# Altium PCB ERN_MainPCB.PcbDoc
Units mil, origin at the board's own origin, x right, y up, seen from the top; angles counter-clockwise.
Board outline 3690 x 4050 mil, 2 copper layers (Top Layer, Bottom Layer); 73 components, 49 nets, 217 pads, 8 vias.
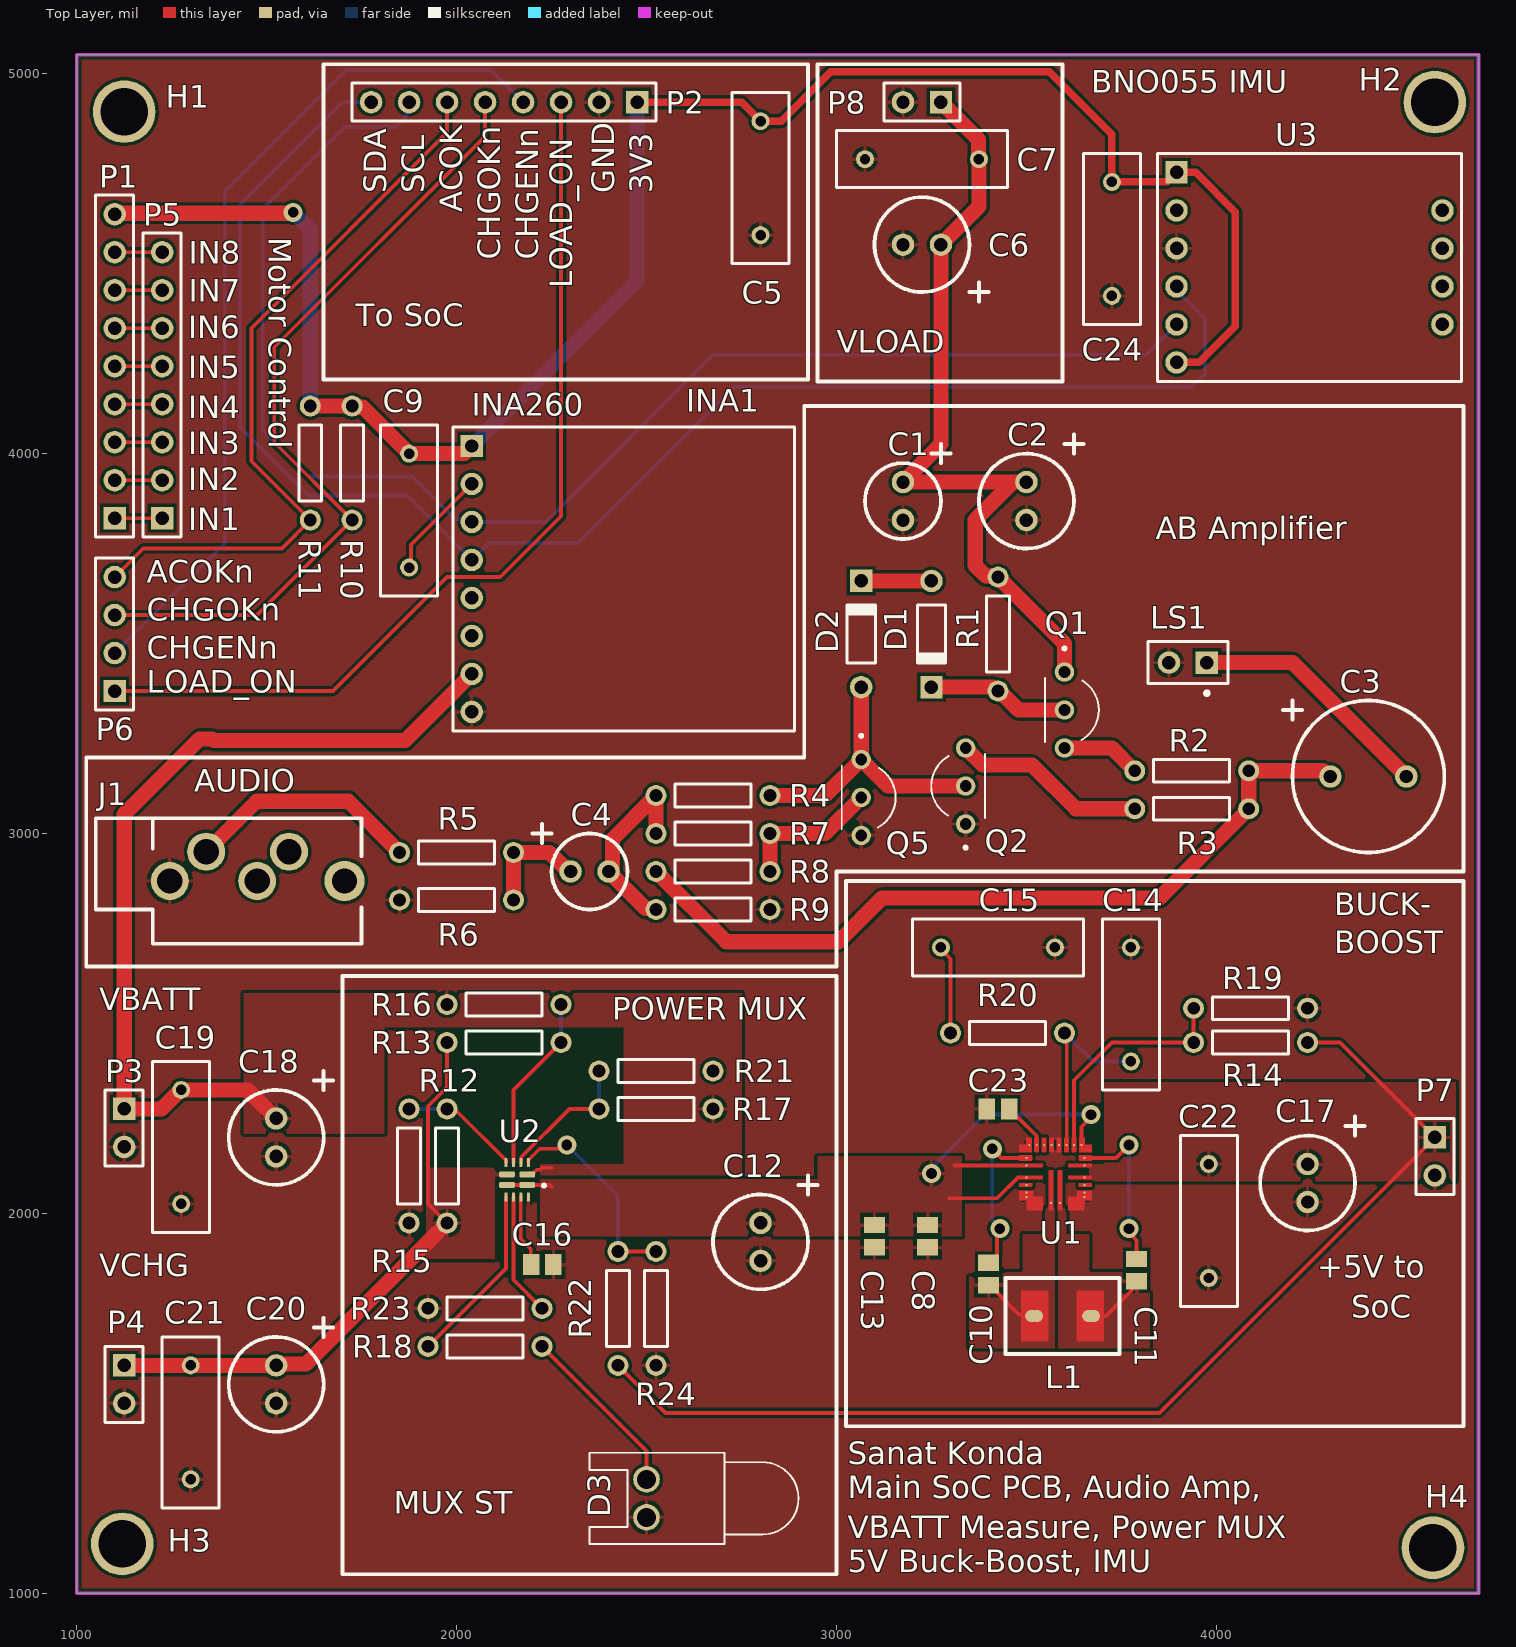
[diagram p0: Top Layer view]
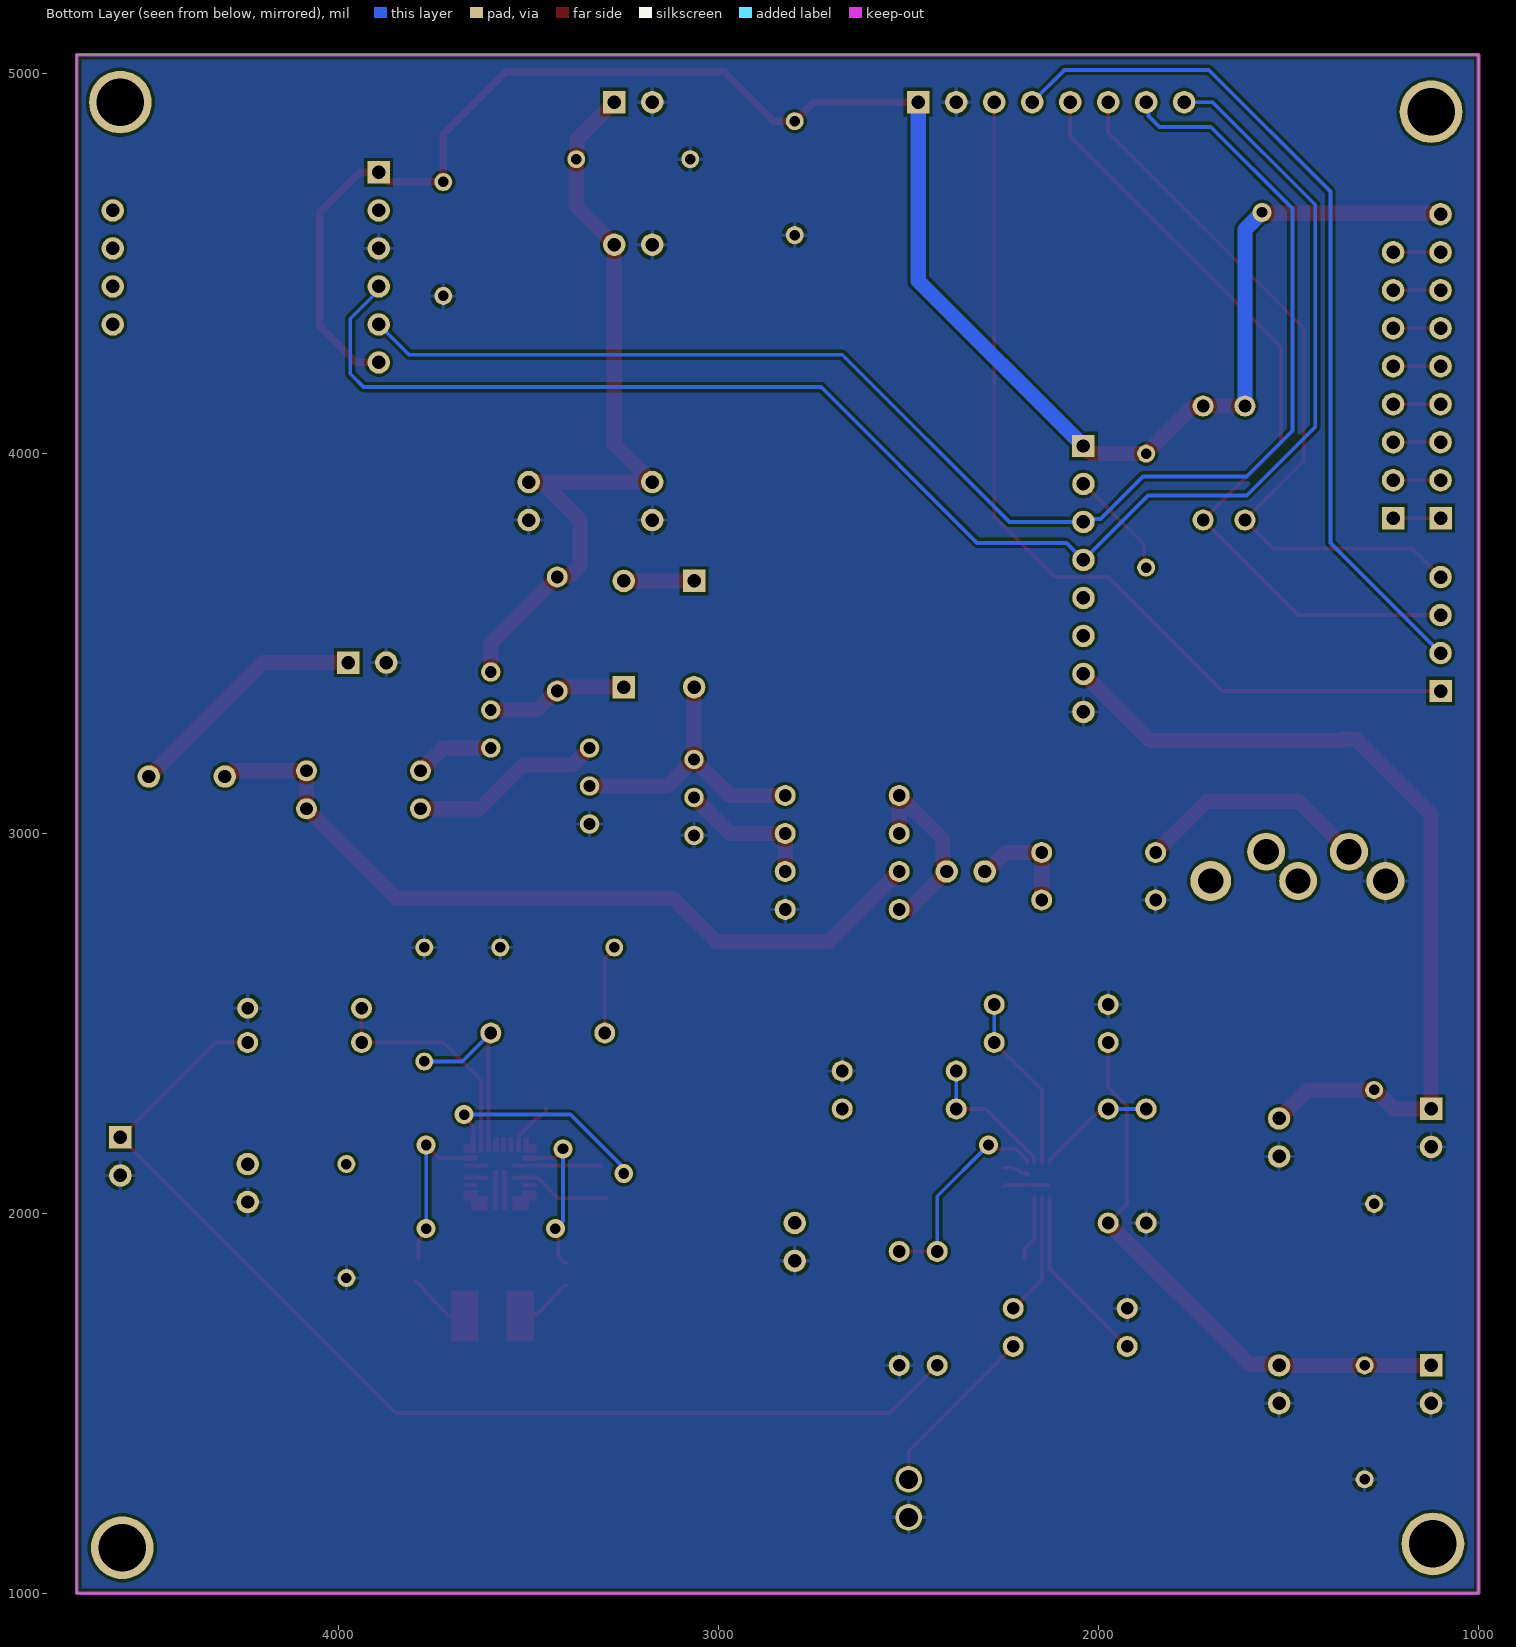
[diagram p1: Bottom Layer view, seen from below]

## Layer stack, top to bottom
Top Solder: solder mask 0.4, Solder Resist, Dk 3.5
Top Layer: signal copper 1.4
Dielectric 1: dielectric 12.6, FR-4, Dk 4.8
Bottom Layer: signal copper 1.4
Bottom Solder: solder mask 0.4, Solder Resist, Dk 3.5

## Board outline
1000,1000 1000,5050 4690,5050 4690,1000

## Design rules (kind name [scope] priority, off if disabled: settings)
Clearance [All] p1: gap=7.87 ignorepadtopadclearanceinfootprint=FALSE
MinimumAnnularRing [All] p1: minimumring=6
MinimumSolderMaskSliver [All] p1: minsoldermaskwidth=4
PolygonConnect [All] p1: connectstyle=Relief reliefconductorwidth=10 reliefentries=4 polygonreliefangle="90 Angle" airgapwidth=10
RoutingVias [All] p1: holewidth=28 width=50 viastyle="Through Hole" minholewidth=28 minwidth=50 maxholewidth=28 maxwidth=50
SolderMaskExpansion [All] p1: expansion=4 istentingtop=FALSE
SupplyNets "Schematic Supply Nets_4" [InNet('+3V3')] p1: voltage=0.000
SupplyNets "Schematic Supply Nets_3" [InNet('VLOAD')] p2: voltage=0.000
SupplyNets "Schematic Supply Nets_2" [InNet('+5')] p3: voltage=0.000
SupplyNets "Schematic Supply Nets_1" [InNet('VBATT')] p4: voltage=0.000
SupplyNets "Schematic Supply Nets" [InNet('GND')] p5: voltage=0.000
Width [All] p1: maxlimit=40 minlimit=10 preferedwidth=10
29 further rules are at their usual default settings.

## Classes and differential pairs
component class ERN_Main_2: C1 C2 C3 C4 D1 D2 J1 LS1 Q1 Q2 Q5 R1 R2 R3 R4 R5 R6 R7 R8 R9
component class ERN_Main: C5 C6 C7 C8 C9 C10 C11 C12 C13 C14 C15 C16 C17 C18 C19 C20 C21 C22 C23 C24 D3 H1 H2 H3 H4 INA1 L1 P1 P2 P3 P4 P5 P6 P7 P8 R10 R11 R12 R13 R14 R15 R16 R17 R18 R19 R20 R21 R22 R23 R24 U1 U2 U3

## Components (designator, comment, footprint, x,y, rotation, side; value= is the part's Value field where it differs from the comment)
C1 "Cap Pol1" Cap_10uF 3175,3875 r270 top value=10uF
C2 "Cap Pol1" Cap_47uF_100uF 3500,3875 r270 top value=100uF
C3 "Cap Pol1" Cap_1000uF 4400,3150 r0 top value=1000uF
C4 "Cap Pol1" Cap_10uF 2350,2900 r0 top value=15uF
C5 "Cap" RAD-0.3 2800,4725 r90 top value=0.1uF
C6 "Cap Pol1" Cap_47uF_100uF 3225,4550 r180 top value=100uF
C7 "Cap" RAD-0.3 3225,4775 r0 top value=0.1uF
C8 "Cap" c0805 3240,1940 r90 top value=4.7uF
C9 "Cap" RAD-0.3 1875,3850 r270 top value=0.1uF
C10 "Cap" c0805 3400,1840.47 r270 top value=0.1uF
C11 "Cap" c0805 3790,1850.47 r90 top value=0.1uF
C12 "Cap Pol1" Cap_47uF_100uF 2800,1925 r270 top value=47uF
C13 "Cap" c0805 3100,1940 r90 top value=4.7uF
C14 "Cap" RAD-0.3 3775,2550 r270 top value=0.1uF
C15 "Cap" RAD-0.3 3425,2700 r180 top value=0.1uF
C16 "Cap" C0805 2225.47,1865 r0 top value=1uF
C17 "Cap Pol1" Cap_47uF_100uF 4240,2080 r270 top value=47uF
C18 "Cap Pol1" Cap_47uF_100uF 1525,2200 r270 top value=100uF
C19 "Cap" RAD-0.3 1275,2175 r90 top value=0.1uF
C20 "Cap Pol1" Cap_47uF_100uF 1525,1550 r270 top value=100uF
C21 "Cap" RAD-0.3 1300,1450 r90 top value=0.1uF
C22 "Cap" RAD-0.3 3980,1980 r90 top value=0.1uF
C23 "Cap" c0805 3425,2275 r0 top value=4.7uF
C24 "Cap" RAD-0.3 3725,4565 r270 top value=0.1uF
D1 "Diode 1N4148" DO-35 3250,3525 r270 top
D2 "Diode 1N4148" DO-35 3064.83,3524.98 r90 top
D3 "LED2" led-0 2500,1250 r90 top
H1 "Hole 125mil" "Hole 125mil" 1125,4900 r0 top
H2 "Hole 125mil" "Hole 125mil" 4575,4925 r0 top
H3 "Hole 125mil" "Hole 125mil" 1120,1130 r0 top
H4 "Hole 125mil" "Hole 125mil" 4570,1120 r0 top
INA1 "INA260" INA260_Breakout 2040,4020 r0 top
J1 "3.5mm jack GM" "3.5mm jack GM" 1245,2875 r270 top
L1 "Inductor" SRP6540-4R7M 3595,1730 r0 top value=4.7uH
LS1 "Speaker" PIN2 3975,3450 r180 top
P1 "Header 9" HDR1X9 1100,3830 r90 top
P2 "Header 8" HDR1X8 2475,4925 r180 top
P3 "Header 2" HDR1X2 1125,2275 r270 top
P4 "Header 2" HDR1X2 1125,1600 r270 top
P5 "Header 8" HDR1X8 1225,3830 r90 top
P6 "Header 4" HDR1X4 1100,3375 r90 top
P7 "Header 2" HDR1X2 4575,2200 r270 top
P8 "Header 2" HDR1X2 3275,4925 r180 top
Q1 "NPN" TO92254P460H750-3 3600,3325 r270 top
Q2 "PNP" TO92254P460H750-3 3340,3125 r90 top
Q5 "NPN" TO92254P460H750-3 3065,3095 r270 top
R1 "Res1" AXIAL-0.3 3425,3525 r90 top value=1K
R2 "Res1" AXIAL-0.3 3935,3165 r0 top value=4.7
R3 "Res1" AXIAL-0.3 3935,3065 r0 top value=4.7
R4 "Res1" AXIAL-0.3 2675,3100 r0 top value=5K
R5 "Res1" AXIAL-0.3 2000,2950 r180 top value=15K
R6 "Res1" AXIAL-0.3 2000,2825 r0 top value=1K
R7 "Res1" AXIAL-0.3 2675,3000 r0 top value=100
R8 "Res1" AXIAL-0.3 2675,2900 r180 top value=100K
R9 "Res1" AXIAL-0.3 2675,2800 r180 top value=33K
R10 "Res1" AXIAL-0.3 1725,3975 r270 top value=10k
R11 "Res1" AXIAL-0.3 1615,3975 r270 top value=10k
R12 "Res1" AXIAL-0.3 1975,2125 r90 top value=42k
R13 "Res1" AXIAL-0.3 2125,2450 r0 top value=23.7k
R14 "Res1" AXIAL-0.3 4090,2450 r180 top value=50k
R15 "Res1" AXIAL-0.3 1875,2125 r270 top value=5k
R16 "Res1" AXIAL-0.3 2125,2550 r180 top value=5K
R17 "Res1" AXIAL-0.3 2525,2275 r180 top value=42k
R18 "Res1" AXIAL-0.3 2075,1650 r0 top value=220
R19 "Res1" AXIAL-0.3 4090,2540 r0 top value=10k
R20 "Res1" AXIAL-0.3 3450,2475 r180 top value=1K
R21 "Res1" AXIAL-0.3 2525,2375 r0 top value=5k
R22 "Res1" AXIAL-0.3 2425,1750 r90 top value=5k
R23 "Res1" AXIAL-0.3 2075,1750 r180 top value=21.5k
R24 "Res1" AXIAL-0.3 2525,1750 r270 top value=5k
U1 "MAX25240AFFF/VY+T" "21-100399_90-100137_ADI - duplicate" 3576.28,2103.54 r0 top
U2 "TPS2121RUXR" IC_TPS2121RUXR 2159.25,2088.78 r180 top
U3 "BNO055" BNO055_Breakout 3895,4740 r0 top

## Footprints (in the part's own frame and the unit in brackets; to place one, negate y for a bottom-side part, rotate by r counter-clockwise, add the part's x,y. Pads: shape width x height; smd on the part's side, far side on the other; paste and mask are expansions set on the pad)
"3.5mm jack GM" [mil]
  round 100 hole 66.5: 1(0,0) 2(-77,96) 3(0,230) 4(-77,314)
  round 106.5 hole 66.5: 5(0,460)
  silkscreen extent -165,-195 165,505
"21-100399_90-100137_ADI - duplicate" [mil]
  rect 5x5 smd paste-2.5 mask-2.5: 1(-76.28,42.32) 2(-76.28,22.64) 3(-76.28,-8.86) 4(-76.28,-28.54) 5(-76.28,-48.23) 6(-76.28,-60.04) 7(-11.81,-76.28) 8(11.81,-76.28) 9(76.28,-60.04) 10(76.28,-48.23) 11(76.28,-28.54) 12(76.28,-8.86) 13(76.28,22.64) 14(76.28,42.32) 15(68.9,76.28) 16(49.21,76.28) 17(29.53,76.28) 18(9.84,76.28) 19(-9.84,76.28) 20(-29.53,76.28) 21(-49.21,76.28) 22(-68.9,76.28)
  Top Layer region: 58.07,-43.31 95.47,-43.31 95.47,-68.9 75.79,-68.9 75.79,-95.47 33.46,-95.47 33.46,-60.04 34.45,-59.06 58.07,-59.06
  Top Layer region: -3.94,58.56 -3.94,95.47 -15.75,95.47 -15.75,58.56 -14.27,57.09 -5.41,57.09
  Top Layer region: 15.75,58.56 15.75,95.47 3.94,95.47 3.94,58.56 5.41,57.09 14.27,57.09
  Top Layer region: -76.77,76.77 -76.77,95.47 -62.99,95.47 -62.99,57.09 -95.47,57.09 -95.47,76.77
  Top Layer region: -58.07,-43.31 -95.47,-43.31 -95.47,-68.9 -75.79,-68.9 -75.79,-95.47 -33.46,-95.47 -33.46,-60.04 -34.45,-59.06 -58.07,-59.06
  Top Layer region: 62.01,-23.62 95.47,-23.62 95.47,-33.46 62.01,-33.46 61.02,-32.48 61.02,-24.61
  Top Layer region: -34.45,27.56 -95.47,27.56 -95.47,17.72 -34.45,17.72 -33.46,18.7 -33.46,26.57
  Top Layer region: -62.01,-23.62 -95.47,-23.62 -95.47,-33.46 -62.01,-33.46 -61.02,-32.48 -61.02,-24.61
  Top Layer region: -62.75,49.21 -95.47,49.21 -95.47,35.43 -62.75,35.43 -61.02,37.16 -61.02,47.49
  Top Layer region: 34.45,-3.94 95.47,-3.94 95.47,-13.78 34.45,-13.78 33.46,-12.8 33.46,-4.92
  Top Layer region: -34.45,-3.94 -95.47,-3.94 -95.47,-13.78 -34.45,-13.78 -33.46,-12.8 -33.46,-4.92
  Top Layer region: 34.45,27.56 95.47,27.56 95.47,17.72 34.45,17.72 33.46,18.7 33.46,26.57
  Top Layer region: 62.75,49.21 95.47,49.21 95.47,35.43 62.75,35.43 61.02,37.16 61.02,47.49
  Top Layer region: 76.77,76.77 76.77,95.47 62.99,95.47 62.99,57.09 95.47,57.09 95.47,76.77
  Top Layer region: 55.12,58.56 55.12,95.47 43.31,95.47 43.31,58.56 44.78,57.09 53.64,57.09
  Top Layer region: 35.43,58.56 35.43,95.47 23.62,95.47 23.62,58.56 25.1,57.09 33.96,57.09
  Top Layer region: -17.72,8.37 -17.72,-95.47 -5.91,-95.47 -5.91,8.37 -7.38,9.84 -16.24,9.84
  Top Layer region: -23.62,58.56 -23.62,95.47 -35.43,95.47 -35.43,58.56 -33.96,57.09 -25.1,57.09
  Top Layer region: 5.91,8.37 5.91,-95.47 17.72,-95.47 17.72,8.37 16.24,9.84 7.38,9.84
  Top Layer region: -43.31,58.56 -43.31,95.47 -55.12,95.47 -55.12,58.56 -53.64,57.09 -44.78,57.09
AXIAL-0.3 [mm] "Axial Device, Thru-Hole; 2 Leads; 0.3 in Pin Spacing"
  round 1.4 hole 0.85: 1(-3.81,0) 2(3.81,0)
  silkscreen extent -2.54,-0.76 2.54,0.76
BNO055_Breakout [mm]
  rect 1.5x1.5 hole 0.9: 1(0,0)
  round 1.5 hole 0.9: 2(0,-2.54) 3(0,-5.08) 4(0,-7.62) 5(0,-10.16) 6(0,-12.7) 7(17.78,-2.54) 8(17.78,-5.08) 9(17.78,-7.62) 10(17.78,-10.16)
  silkscreen extent -1.27,-13.97 19.05,1.27
c0805 [mm] "Chip Capacitor, Body 2.0x1.3mm, IPC High Density"
  rect 1.1x1.4 smd: 1(-0.75,0) 2(0.75,0)
  body extent -1.1,-0.72 1.1,0.72, height 1.4
C0805 [mm] "Chip Capacitor, Body 2.0x1.3mm, IPC High Density"
  rect 1.1x1.4 smd: 1(-0.75,0) 2(0.75,0)
  body extent -1.1,-0.72 1.1,0.72, height 1.4
Cap_10uF [mm] "10uF Electrolytic Capacitor"
  round 1.5 hole 0.9: 1(-1.27,0) 2(1.27,0)
  silkscreen extent -3.81,-2.54 2.54,3.17
Cap_47uF_100uF [mm] "47uF or 100uF Electrolytic Capacitor"
  round 1.5 hole 0.9: 1(-1.27,0) 2(1.27,0)
  silkscreen extent -4.45,-3.17 3.17,3.81
Cap_1000uF [mm] "100uF Electrolytic Capacitor"
  round 1.5 hole 0.9: 1(-2.54,0) 2(2.54,0)
  silkscreen extent -5.71,-5.08 5.08,5.08
DO-35 [mm] "Diode, Axial; Body 3.8 x 1.9 mm (LxDia. max), Lead Dia. 0.53 mm (max)"
  round 1.5 hole 0.9: 1(-3.55,0)
  rect 1.5x1.5 hole 0.9: 2(3.55,0)
  silkscreen extent -1.95,-0.95 2.05,0.95
HDR1X2 [mm] "Connector; Header; 2 Position"
  rect 1.5x1.5 hole 0.9: 1(0,0)
  round 1.5 hole 0.9: 2(2.54,0)
  silkscreen extent -1.27,-1.27 3.81,1.27
HDR1X4 [mm] "Connector; Header; 4 Position"
  rect 1.5x1.5 hole 0.9: 1(0,0)
  round 1.5 hole 0.9: 2(2.54,0) 3(5.08,0) 4(7.62,0)
  silkscreen extent -1.27,-1.27 8.89,1.27
HDR1X8 [mm] "Connector; Header; 8 Position"
  rect 1.5x1.5 hole 0.9: 1(0,0)
  round 1.5 hole 0.9: 2(2.54,0) 3(5.08,0) 4(7.62,0) 5(10.16,0) 6(12.7,0) 7(15.24,0) 8(17.78,0)
  silkscreen extent -1.27,-1.27 19.05,1.27
HDR1X9 [mm] "Connector; Header; 9 Position"
  rect 1.5x1.5 hole 0.9: 1(0,0)
  round 1.5 hole 0.9: 2(2.54,0) 3(5.08,0) 4(7.62,0) 5(10.16,0) 6(12.7,0) 7(15.24,0) 8(17.78,0) 9(20.32,0)
  silkscreen extent -1.27,-1.27 21.59,1.27
"Hole 125mil" [mil]
  round 165 hole 125: 1(0,0)
IC_TPS2121RUXR [mm]
  rrect50% 1.05x0.4 smd mask+0: 1(-0.675,0.35) 2(-0.675,-0.35) 7(0.675,-0.35) 8(0.675,0.35)
  round 0.3 smd mask+0: 1_1(-0.4,0.35) 2_1(-0.4,-0.35) 7_1(0.4,-0.35) 8_1(0.4,0.35)
  rrect50% 0.2x0.6 smd mask+0: 3(-0.75,-1.15) 4(-0.25,-1.15) 5(0.25,-1.15) 6(0.75,-1.15) 9(0.75,1.15) 10(0.25,1.15) 11(-0.25,1.15) 12(-0.75,1.15)
  silkscreen extent -1.9,0.3 -1.7,0.5, body extent -1,-1.25 1,1.25, height 1
INA260_Breakout [mm] "Adafruit INA260 Voltage/Current Sensor Breakout"
  rect 1.5x1.5 hole 0.9: 1(0,0)
  round 1.5 hole 0.9: 2(0,-2.54) 3(0,-5.08) 4(0,-7.62) 5(0,-10.16) 6(0,-12.7) 7(0,-15.24) 8(0,-17.78)
  silkscreen extent -1.27,-19.05 21.59,1.27
led-0 [mil] "LED; 2 Leads"
  round 70 hole 50: 1(50,0) 2(-50,0)
  silkscreen extent -120,-400 120,150
PIN2 [mm] "Photosensitive Diode; 2 Leads"
  rect 1.5x1.5 hole 0.9: 1(0,0)
  round 1.5 hole 0.9: 2(2.54,0)
  silkscreen extent -1.4,-1.4 3.94,2.17
RAD-0.3 [mm] "Radial Cap, Thru-Hole; 2 Leads; 0.3 in Pin Spacing"
  round 1.2 hole 0.7: 1(-3.81,0) 2(3.81,0)
  silkscreen extent -5.71,-1.91 5.71,1.91
SRP6540-4R7M [mm] "4.7 µH Shielded Drum Core, Wirewound Inductor 6 A 33.5mOhm Max Nonstandard"
  oval 1.2x0.8 smd mask+0: 1(-1.905,0) 2(1.905,0)
  Top Layer region: -2.775,-1.702 -0.933,-1.702 -0.933,1.702 -2.775,1.702
  Top Layer region: 0.933,-1.702 2.775,-1.702 2.775,1.702 0.933,1.702
  silkscreen extent -3.81,-2.54 3.81,2.54
TO92254P460H750-3 [mm]
  round 1.298 hole 0.79 mask+0.102: 1(-2.54,0) 2(0,0) 3(2.54,0)
  silkscreen extent -4.22,-1.3 2.15,2.3, body extent -2.74,-1.14 2.74,2.46, height 4.6

## Part data
C1 C2 C3 C4 C6 C12 C17 C18 C20: "Polarized Capacitor (Radial)", LatestRevisionDate=17-Jul-2002, LatestRevisionNote="Re-released for DXP Platform.", PackageDescription="Polarized Capacitor (Radial); 2 Leads", PackageReference=RB7.6-15, Published=8-Jun-2000, Publisher="Altium Limited"
C5 C7 C8 C9 C10 C11 C13 C14 C15 C16 C19 C21 C22 C23 C24: "Capacitor", LatestRevisionDate=17-Jul-2002, LatestRevisionNote="Re-released for DXP Platform.", PackageDescription="Radial Cap, Thru-Hole; 2 Leads; 0.3 in Pin Spacing", PackageReference=RAD-0.3, Published=8-Jun-2000, Publisher="Altium Limited"
D1 D2: "High Conductance Fast Diode", Code_JEDEC=DO-204-AH, ComponentLink1Description="Manufacturer Link", ComponentLink1URL=http://www.fairchildsemi.com/, ComponentLink2Description=Datasheet, ComponentLink2URL=http://www.fairchildsemi.com/ds/1N%2F1N4148.pdf, DatasheetVersion=1997, LatestRevisionDate=17-Jul-2002, LatestRevisionNote="Re-released for DXP Platform.", PackageDescription="Diode, Axial; Body 3.8 x 1.9 mm (LxDia. max), Lead Dia. 0.53 mm (max)", PackageReference=DO-35, Published=8-Jun-2000, Publisher="Altium Limited"
D3: "Typical RED, GREEN, YELLOW, AMBER GaAs LED", LatestRevisionDate=17-Jul-2002, LatestRevisionNote="Re-released for DXP Platform.", PackageDescription="SM LED; 2 Flat Leads", PackageReference=3.2X1.6X1.1, PackageVersion=Feb-2002, Published=8-Jun-2000, Publisher="Altium Limited"
INA1: library part INA260_Breakout, "Voltage and current sensor"
LS1: "Loudspeaker", LatestRevisionDate=17-Jul-2002, LatestRevisionNote="Re-released for DXP Platform.", PackageReference=PIN2, Published=24-Mar-1999, Publisher="Altium Limited"
P1: "Header, 9-Pin", LatestRevisionDate=17-Jul-2002, LatestRevisionNote="Re-released for DXP Platform.", Publisher="Altium Limited"
P2 P5: "Header, 8-Pin", LatestRevisionDate=17-Jul-2002, LatestRevisionNote="Re-released for DXP Platform.", Publisher="Altium Limited"
P3 P4 P7 P8: "Header, 2-Pin", LatestRevisionDate=17-Jul-2002, LatestRevisionNote="Re-released for DXP Platform.", Publisher="Altium Limited"
P6: "Header, 4-Pin", LatestRevisionDate=17-Jul-2002, LatestRevisionNote="Re-released for DXP Platform.", Publisher="Altium Limited"
Q1 Q5: "NPN Bipolar Transistor", Code_JEDEC=TO-226-AA, LatestRevisionDate=17-Jul-2002, LatestRevisionNote="Re-released for DXP Platform.", PackageDescription="TO, Flat Index; 3 In-Line, Axial Leads; Body Dia. 4.8mm; Leads 0.55 x 0.51 mm (max)", PackageReference=TO-226-AA, Published=8-Jun-2000, Publisher="Altium Limited"
Q2: "PNP Bipolar Transistor", LatestRevisionDate=29-May-2009, LatestRevisionNote="IPC-7351 Footprint Added.", PackageDescription="3-Pin SOT-23 Package 0.95 mm Pitch, 2.4 mm Lead Span", PackageReference=SOT-23B, PackageVersion=Aug-1999, Published=8-Jun-2000, Publisher="Altium Limited"
R1 R2 R3 R4 R5 R6 R7 R8 R9 R10 R11 R12 R13 R14 R15 R16 R17 R18 R19 R20 R21 R22 R23 R24: "Resistor", LatestRevisionDate=17-Jul-2002, LatestRevisionNote="Re-released for DXP Platform.", PackageDescription="Axial Device, Thru-Hole; 2 Leads; 0.3 in Pin Spacing", PackageReference=AXIAL-0.3, Published=8-Jun-2000, Publisher="Altium Limited"
U1: library part MAX25240AFFFVY+T, "Automotive 2V to 36V, 6A Buck-Boost Converters", Manufacturer_Name="Analog Devices Inc", Copyright="Copyright (C) 2025 Ultra Librarian. All rights reserved.", Manufacturer_Part_Number=MAX25240AFFF/VY+T, RefDes=RefDes, Type=RF
U2: "2.7-V&nbsp;to 22-V, 56-mâ„", Package="VQFN-HR-12 Texas Instruments", Availability="In Stock", Check_prices=https://www.snapeda.com/parts/TPS2121RUXR/Texas+Instruments/view-part/?ref=eda, MF="Texas Instruments", MP=TPS2121RUXR, Price=None, Purchase-URL=https://pricing.snapeda.com/search?q=TPS2121RUXR&ref=eda, SnapEDA_Link=https://www.snapeda.com/parts/TPS2121RUXR/Texas+Instruments/view-part/?ref=snap
U3: library part BNO055_Breakout, "Adafruit IMU Breakout"
L1: Code_IEC=1005, Code_JEITA=0402, LatestRevisionDate=29-May-2009, LatestRevisionNote="IPC-7351 Footprint Added.", PackageDescription="Chip Inductor", PackageReference=0402-A, Published=8-Jun-2000, Publisher="Altium Limited"

## Via types
v1: diameter 50, hole 28, Top Layer to Bottom Layer, 8 vias

## Nets (pads, with @x,y where several pads share a name; then routed paths per layer and width w, separated by ;. In a path a pad name is that pad's centre, name@x,y a point inside that pad or via, vN(x,y) a via of type N, cw(c..) or ccw(c..) an arc to the next point about the centre after c; other vN are vias at no path point)
+3V3: C5.2 C9.1 C24.1 INA1.1 P1.9 P2.1 R10.1 R11.1 U3.1 U3.6 | length 4958.1
  Top Layer w10: P1.9 P1.9@1102.5,4632.5 ; v1@1567.5,4632.5 v1(1570,4635)
  Top Layer w20: P2.1 2750,4925 C5.2 2855,4875 2985,5005 3560,5005 3725,4840 C24.1 3870,4715 U3.1 3945,4740 4050,4635 4050,4335 3955,4240 U3.6
  Top Layer w40: P1.9@1102.5,4632.5 v1@1567.5,4632.5 ; R11.1 R10.1 1727.89,4122.11 1752.89,4122.11 C9.1@1873.61,4001.39 ; C9.1@1876.96,4000 2020,4000 INA1.1
  Bottom Layer w40: v1(1570,4635) 1615,4590 R11.1 ; INA1.1 2475,4455 P2.1
+5: C17.1 C22.2 P7.1 R14.1 R22.1 U1.12 U1.13 | length 2940.6
  Top Layer w10: R22.1 2550,1475 3850,1475 P7.1 4325,2450 R14.1
A\C\O\K\: P2.6 P6.4 R11.2 | length 1954.7
  Top Layer w10: P6.4 1175.38,3750.38 1540.38,3750.38 R11.2 1460,3980 1460,4330 1975,4845 P2.6
C\H\G\_\E\N\: P2.4 P6.2 | length 2287.9
  Bottom Layer w10: P6.2 1390,3765 1390,4690 1710,5010 2090,5010 P2.4
C\H\G\O\K\: P2.5 P6.3 R10.2 | length 2143.4
  Top Layer w10: P6.3 1475,3575 R10.2 1520,4030 1520,4280 2075,4835 P2.5
CHG_HV: C20.1 C21.2 P4.1 R12.1 R13.1 U2.7 U2.7_1 | length 1521.8
  Top Layer w10: R12.1 1925,2025 1925,2282.18 1975,2332.18 R13.1
  Top Layer w40: P4.1 C21.2 C20.1 1528.65,1603.65 1603.65,1603.65 R12.1
GND: C1.2 C2.2 C5.1 C6.2 C7.1 C8.1 C12.2 C13.1 C14.1 C15.1 C16.2 C17.2 C18.2 C19.1 C20.2 C21.1 C22.1 C23.1 C24.2 D3.2 INA1.8 J1.1 LS1.2 P2.2 P3.2 P4.2 P7.2 P8.2 Q2.1 Q5.3 R6.1 R9.1 R15.2 R16.2 R19.2 R21.2 R23.2 R24.2 U1.5 U1.6 U1.9 U1.10 U1.18 U1.19 U1.22 U2.12 U3.3
I2C_SCL: INA1.3 P2.7 U3.5 | length 3823.4
  Bottom Layer w10: P2.7 1868.51,4918.51 1868.51,4888.51 1840,4860 1705,4860 1490,4645 1490,4060 1610,3940 1883.39,3940 1995.47,3827.91 2032.09,3827.91 INA1.3 2235,3820 2675,4260 3815,4260 U3.5
I2C_SDA: INA1.4 P2.8 U3.4 | length 4190.8
  Bottom Layer w10: P2.8 1700,4925 1430,4655 1430,4070 1610,3890 1870,3890 INA1.4 2085,3765 2320,3765 2730,4175 3935,4175 3970,4210 3970,4355 3895,4430 U3.4
IN1: P1.1 P5.1 | length 125
  Top Layer w10: P1.1 P5.1
IN2: P1.2 P5.2 | length 125
  Top Layer w10: P1.2 P5.2
IN3: P1.3 P5.3 | length 125
  Top Layer w10: P1.3 P5.3
IN4: P1.4 P5.4 | length 125
  Top Layer w10: P1.4 P5.4
IN5: P1.5 P5.5 | length 125
  Top Layer w10: P1.5 P5.5
IN6: P1.6 P5.6 | length 125
  Top Layer w10: P1.6 P5.6
IN7: P1.7 P5.7 | length 125
  Top Layer w10: P1.7 P5.7
IN8: P1.8 P5.8 | length 125
  Top Layer w10: P1.8 P5.8
LOAD_ON: P2.3 P6.1 | length 2455.5
  Top Layer w10: P6.1 1675,3375 1975,3675 2115,3675 2275,3835 P2.3
NetC3_1: C3.1 R2.2 R3.2 R8.2 | length 2102.8
  Top Layer w40: R8.2 2710,2715 3005,2715 3120,2830 3850,2830 R3.2 R2.2 4279.84,3165 4294.84,3150 C3.1
NetC3_2: C3.2 LS1.1 | length 649.3
  Top Layer w40: LS1.1 4200,3450 C3.2
NetC4_1: C4.1 R5.1 R6.2 | length 295.7
  Top Layer w40: R6.2 R5.1 2244.84,2950 2294.84,2900 C4.1
NetC4_2: C4.2 R4.1 R7.1 R9.2 | length 518.2
  Top Layer w40: R9.2 2522.11,2802.89 2497.11,2802.89 C4.2 2400,2905.16 2410,2915.16 2410,2985 R4.1 R7.1
NetC8_2: C8.2 C12.1 C13.2 U1.2 U1.3 U1.15 U2.1 U2.1_1 U2.8 U2.8_1 | length 1076.8
  Top Layer w10: U2.8 U2.8_1 U2.1_1 ; U2.1 2245,2075 2250,2070 ; 3295.99,2040 3422.68,2040 3477.36,2094.68 U1.3 ; 3310,2126.1 3490.22,2126.1 ; U1.15 3645.18,2228.25 3670,2253.08 v1(3670,2260)
  Bottom Layer w10: v1@3255,2125 3390,2260 v1(3670,2260)
  other v1: 3250,2105
NetC9_2: C9.2 INA1.2 | length 288.3
  Top Layer w10: C9.2 1880,3705 1880,3760 INA1.2
NetC10_1: C10.1 U1.1 | length 410
  Top Layer w10: C10.1 3405.91,1870 3422.56,1886.65 3422.56,1952.56 v1(3430,1960) ; v1(3410,2170) 3434.13,2145.87 U1.1
  Bottom Layer w10: v1(3410,2170) 3410,1980 v1@3420,1970
NetC10_2: C10.2 L1.1 U1.7 | length 155.2
  Top Layer w10: C10.2 3405.91,1810.94 3422.56,1794.29 3422.56,1791.47 3479.92,1734.11 3515.89,1734.11 L1.1
NetC11_1: C11.1 L1.2 U1.8 | length 170.5
  Top Layer w10: L1.2 3709.53,1730 3777.44,1797.91 3777.44,1803.82 3793.77,1820.15 C11.1@3799.68,1820.15
NetC11_2: C11.2 U1.14 | length 439.9
  Top Layer w10: U1.14 3735.87,2145.87 v1(3770,2180) ; v1(3770,1960) 3770,1949.18 3790,1929.18 C11.2
  Bottom Layer w10: v1(3770,1960) v1(3770,2180)
NetC14_2: C14.2 R20.1 U1.17 | length 503.6
  Top Layer w10: R20.1 3605.81,2469.19 U1.17
  Bottom Layer w10: R20.1 3675,2400 C14.2
NetC15_2: C15.2 R20.2 | length 235.4
  Top Layer w10: C15.2 3275,2695.38 3300,2670.38 R20.2
NetC16_1: C16.1 U2.11 | length 174.2
  Top Layer w10: U2.11 2169.09,1932.28 2195,1906.38 C16.1@2195,1880
NetC23_2: C23.2 U1.21 | length 129.3
  Top Layer w10: C23.2 3454.53,2269.09 3471.18,2252.44 3478.07,2252.44 3527.07,2203.44 U1.21
NetD1_1: D1.1 D2.2 | length 180
  Top Layer w40: D2.2@3070,3664.76 D1.1
NetD1_2: D1.2 Q1.2 R1.1 | length 375
  Top Layer w40: D1.2 3410.67,3385.24 3420.91,3375 R1.1 3429.09,3375 3479.09,3325 Q1.2
NetD2_1: D2.1 Q2.2 Q5.1 R4.2 | length 773.6
  Top Layer w40: R4.2 2970,3100 Q5.1 ; D2.1@3065,3385.24 Q5.1 ; Q2.2 3135,3125 Q5.1
NetD3_1: D3.1 R18.2 | length 463.9
  Top Layer w10: R18.2 2500,1375 D3.1
NetJ1_2: J1.2 R5.2 | length 620
  Top Layer w40: J1.2 1474,3085 1715,3085 R5.2
NetQ1_3: Q1.3 R2.1 | length 215
  Top Layer w40: Q1.3@3594.87,3225 3725,3225 R2.1
NetQ2_3: Q2.3 R3.1 | length 511.3
  Top Layer w40: Q2.3 3385,3180 3514.98,3180 3629.98,3065 R3.1
NetQ5_2: Q5.2 R7.2 R8.1 | length 379.4
  Top Layer w40: R8.1 R7.2 2970,3000 Q5.2
NetR12_2: R12.2 R15.1 U2.6 | length 316.5
  Top Layer w10: R12.2 1983.63,2266.37 2003.16,2266.37 2129.72,2139.8 U2.6
  Bottom Layer w10: R15.1 R12.2
NetR13_2: R13.2 R16.1 U2.5 | length 468
  Top Layer w10: U2.5 2149.41,2324.41 R13.2
  Bottom Layer w10: R13.2 R16.1
NetR14_2: R14.2 R19.1 U1.16 | length 616.4
  Top Layer w10: U1.16 3625.49,2350.49 3725,2450 R14.2 R19.1
NetR17_2: R17.2 R21.1 U2.4 | length 372
  Top Layer w10: U2.4 2170.16,2135.12 2170.16,2148.23 2296.92,2275 R17.2
  Bottom Layer w10: R17.2 R21.1
NetR18_1: R18.1 U2.9 | length 478.3
  Top Layer w10: R18.1 2129.72,1854.72 U2.9
NetR22_2: R22.2 R24.1 U2.3 | length 559.5
  Top Layer w10: U2.3 2188.78,2139.8 2218.98,2170 2280,2170 v1(2290,2180) ; R22.2 R24.1
  Bottom Layer w10: v1(2290,2180) 2425,2045 R22.2
NetR23_1: R23.1 U2.10 | length 324.8
  Top Layer w10: U2.10 2149.41,1825.59 R23.1
VBATT: C18.1 C19.2 INA1.7 P3.1 R17.1 U2.2 U2.2_1 | length 2369.3
  Top Layer w10: U2.2 2188.7,2105.43 2201.5,2105.43 2211.06,2115 2220,2115 2225,2120 2250,2120
  Top Layer w40: C18.1 1450,2325 C19.2 1273.04,2325 1223.04,2275 P3.1 1125,3050 1323.43,3248.43 1356.57,3248.43 1360,3245 1865,3245 INA1.7
VLOAD: C1.1 C2.1 C6.1 C7.2 P8.1 Q1.1 R1.2 | length 2105.2
  Top Layer w40: P8.1 3373.61,4826.39 3373.61,4776.39 C7.2 3375,4650 C6.1 3275,4025 C1.1 3465,3925 ; C2.1 3465,3925 ; Q1.1 3600,3500 R1.2 3422.11,3677.89 3392.8,3677.89 3365,3705.69 3365,3825 3465,3925
pads on no net: H1.1 H2.1 H3.1 H4.1 INA1.5 INA1.6 J1.3 J1.4 J1.5 U1.4 U1.11 U1.20 U3.2 U3.7 U3.8 U3.9 U3.10

## Polygon pours and split planes (outlines as drawn)
GND on Top Layer "GND_L01_P009" (solid, remove dead copper, pour order 9): 1000,5050 4690,5050 4690,1000 1000,1000
CHG_HV on Top Layer "CHG_HV_L01_P003" (solid, remove dead copper, pour order 3): 2130,2120 2130,2090 2100,2090 2100,1880 1920,1880 1920,2120
+5 on Top Layer "+5_L01_P008" (solid, remove dead copper, pour order 8): 3620,2130 3620,2085 4630,2085 4630,2345 3705,2345 3705,2130
NetC11_1 on Top Layer "NETC11_1_L01_P007" (solid, remove dead copper, pour order 7): 3605,2025 3580,2025 3580,1645 3825,1645 3825,1845 3665,1845 3665,1945 3605,1945
NetC10_2 on Top Layer "NETC10_2_L01_P006" (solid, remove dead copper, pour order 6): 3550,2025 3575,2025 3575,1645 3350,1645 3350,1840 3355,1845 3490,1845 3490,1945 3550,1945
VBATT on Top Layer "VBATT_L01_P004" (solid, remove dead copper, pour order 4): 2220,2130 2220,2100 2750,2100 2750,2580 1440,2580 1440,2210 1810,2210 1810,2490 2440,2490 2440,2130
NetC8_2 on Top Layer "NETC8_2_L01_P000" (solid, remove dead copper, pour order 0): 2220,2090 2220,1940 3330,1940 3330,2090
NetC8_2 on Top Layer "NETC8_2_L01_P005" (solid, remove dead copper, pour order 5): 3330,2080 2950,2080 2950,2150 3330,2150
GND on Bottom Layer "GND_L02_P001" (solid, remove dead copper, pour order 1): 1000,5050 4690,5050 4690,1000 1000,1000

## Keep-outs
Keep-Out Layer:
  the board outline again, w10

## Silkscreen, mask and mechanical layers (free items; w line width, h text height)
Top Overlay:
  lines w10: 1025,2650 3000,2650 3000,2900 4650,2900 4650,4125 2915,4125 2915,3200 2475,3200 1025,3200 1025,2650 ; 1650,4195 2925,4195 2925,4462.5 2925,4837.5 2925,5025 1650,5025 1650,4195 ; 1700,1050 3000,1050 3000,2625 1700,2625 1700,1050 ; 2950,4190 2950,5025 3595,5025 3595,4190 2950,4190 ; 3025,1440 3621.25,1440 4053.75,1440 4650,1440 4650,2875 3025,2875 3025,1440
  text "BNO055 IMU" at 3670,4950 h60
  text "SDA" at 1815,4685 h60 r90
  text "SCL" at 1915,4685 h60 r90
  text "GND" at 2415,4685 h60 r90
  text "3V3" at 2515,4685 h60 r90
  text "ACOK" at 2015,4635 h60 r90
  text "Motor Control" at 1505,4570 h60 r270
  text "CHGOKn" at 2115,4510 h60 r90
  text "CHGENn" at 2215,4510 h60 r90
  text "IN8" at 1295,4500 h60
  text "LOAD_ON" at 2305,4435 h60 r90
  text "IN7" at 1295,4400 h60
  text "To SoC" at 1735,4335 h60
  text "IN6" at 1294.09,4303.03 h60
  text "VLOAD" at 3000,4265 h60
  text "IN5" at 1294.09,4198.03 h60
  text "IN4" at 1294.09,4093.03 h60
  text "IN3" at 1294.09,3998.03 h60
  text "IN2" at 1294.09,3903.03 h60
  text "IN1" at 1294.09,3798.03 h60
  text "AB Amplifier" at 3840,3774.99 h60
  text "ACOKn" at 1185,3660 h60
  text "CHGOKn" at 1185,3560 h60
  text "CHGENn" at 1185,3460 h60
  text "LOAD_ON" at 1185,3370 h60
  text "AUDIO" at 1310,3110 h60
  text "BUCK-" at 4310,2785 h60
  text "BOOST" at 4310,2685 h60
  text "VBATT" at 1060,2535 h60
  text "POWER MUX" at 2410,2510 h60
  text "VCHG" at 1060,1835 h60
  text "+5V to" at 4265,1830 h60
  text "SoC" at 4355,1725 h60
  text "Sanat Konda" at 3030,1340 h60
  text "Main SoC PCB, Audio Amp," at 3030,1249.99 h60
  text "MUX ST" at 1835,1210 h60
  text "VBATT Measure, Power MUX" at 3030,1144.99 h60
  text "5V Buck-Boost, IMU" at 3030,1054.99 h60